# Altium PCB PCB_DC.PcbDoc
Units mm, origin at the board's own origin, x right, y up, seen from the top; angles counter-clockwise.
Board outline 35.05 x 27.18 mm, 2 copper layers (Top Layer, Bottom Layer); 11 components, 3 nets, 36 pads, 0 vias.
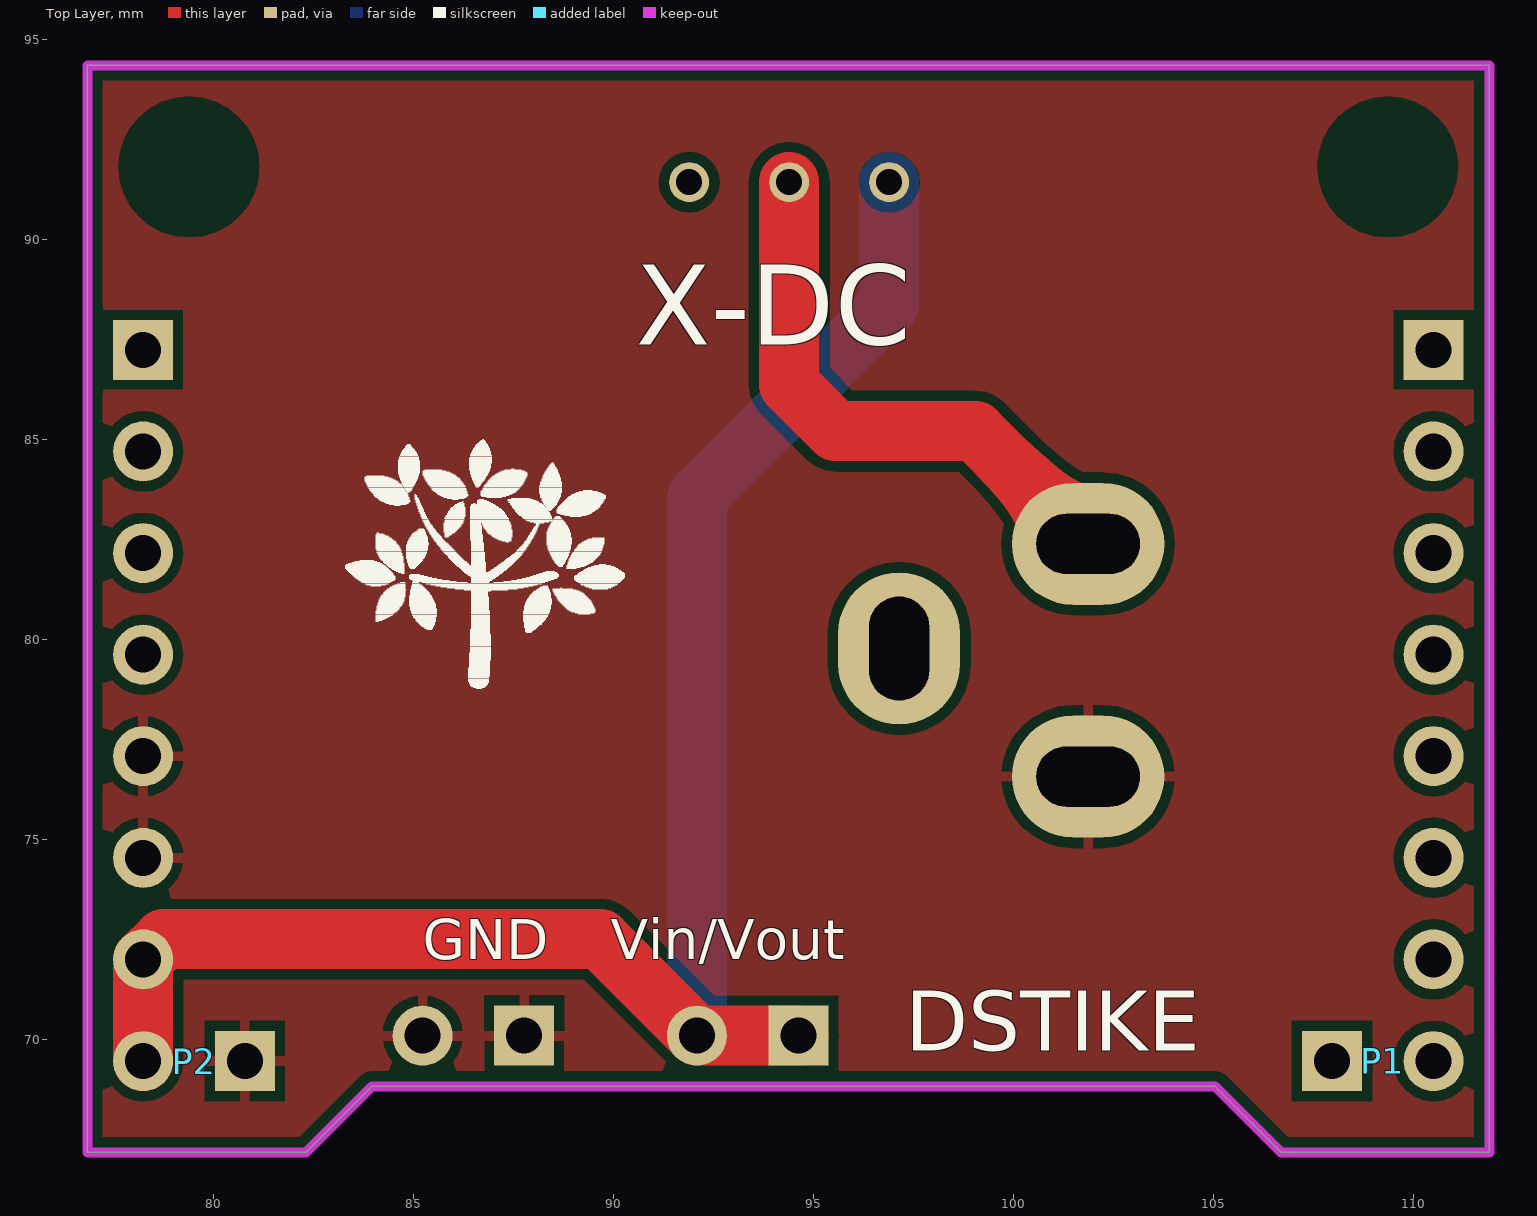
[diagram p0: Top Layer view]
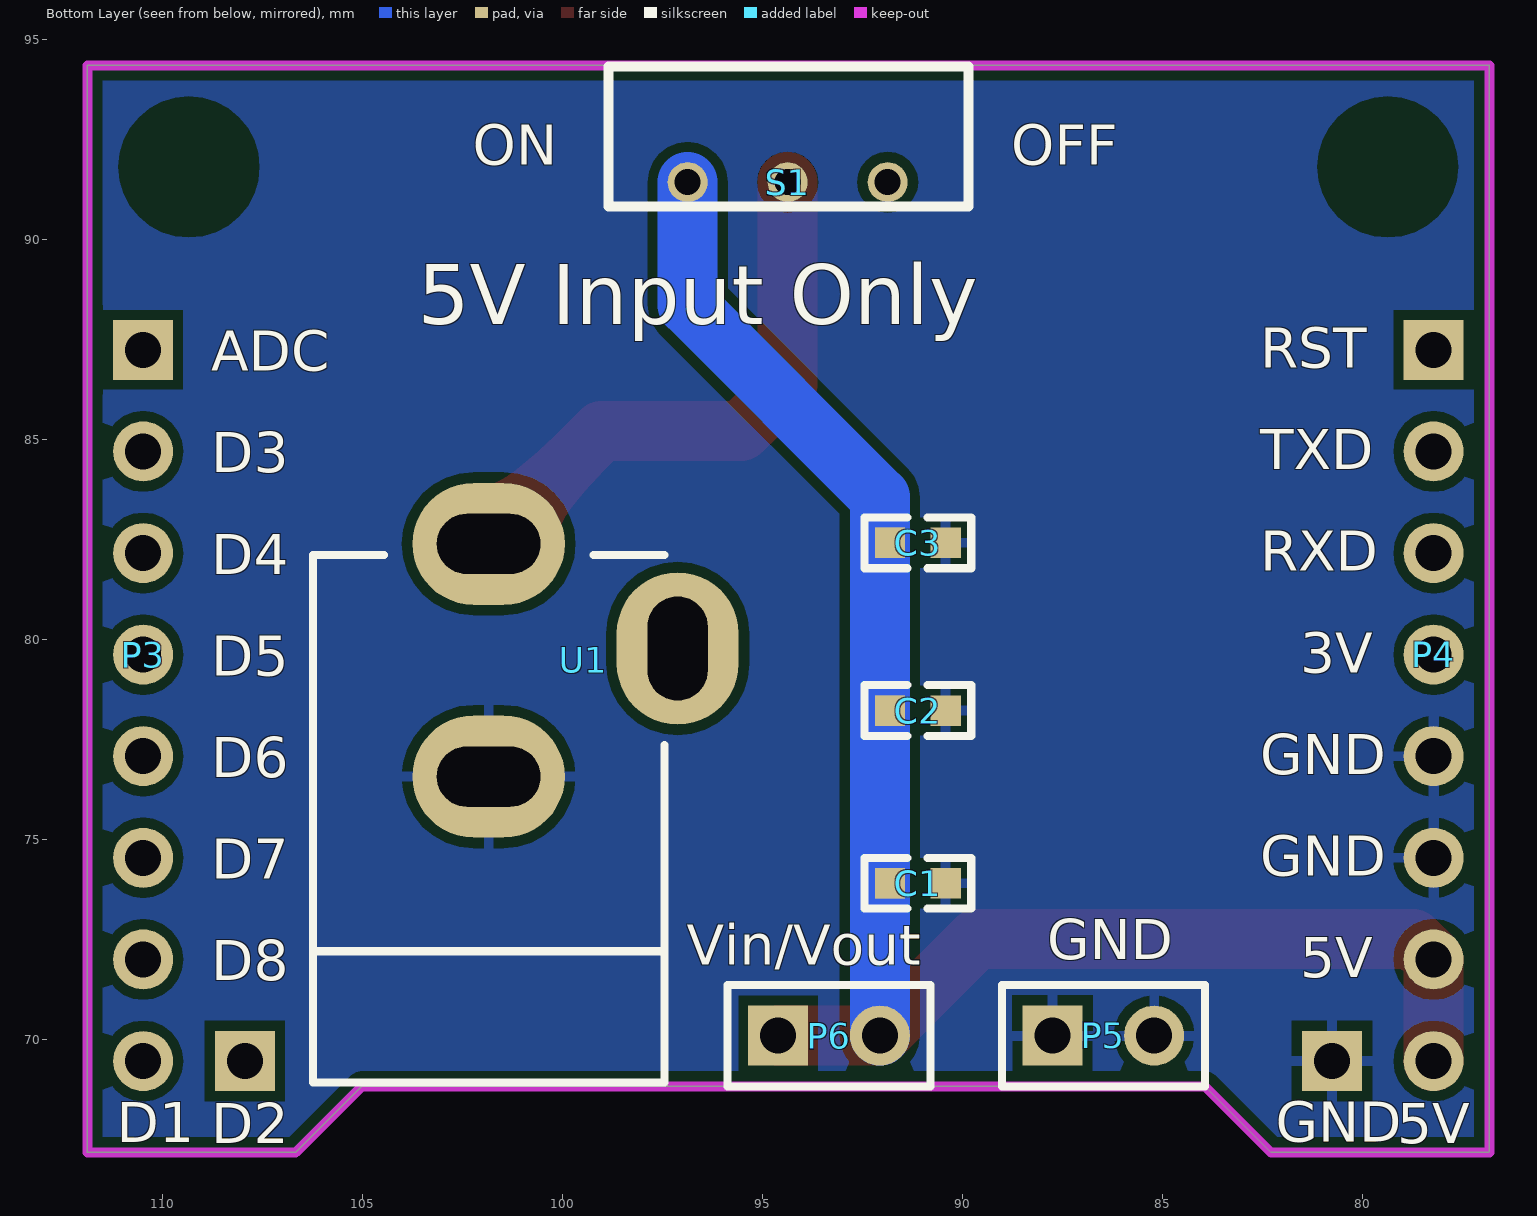
[diagram p1: Bottom Layer view, seen from below]

## Layer stack, top to bottom
Top Solder: solder mask 0.0102, Solder Resist, Dk 3.5
Top Layer: signal copper 0.0356
Dielectric 1: dielectric 0.32, FR-4, Dk 4.8
Bottom Layer: signal copper 0.0356
Bottom Solder: solder mask 0.0102, Solder Resist, Dk 3.5

## Board outline
76.835,67.183 76.835,94.361 111.887,94.361 111.887,67.183 106.68,67.183 105.029,68.834 83.947,68.834 82.296,67.183

## Design rules (kind name [scope] priority, off if disabled: settings)
Clearance [All] p1: gap=0.254
PolygonConnect [All] p1: connectstyle=Relief reliefconductorwidth=0.254 reliefentries=4 polygonreliefangle="90 Angle" airgapwidth=0.254
RoutingVias [All] p1: holewidth=0.711 width=1.27 viastyle="Through Hole" minholewidth=0.711 minwidth=1.27 maxholewidth=0.711 maxwidth=1.27
SolderMaskExpansion [All] p1: expansion=0.102
Width [All] p1: maxlimit=2 minlimit=0.254 preferedwidth=0.254
30 further rules are at their usual default settings.

## Components (designator, comment, footprint, x,y, rotation, side; value= is the part's Value field where it differs from the comment)
C1 "10uF" C0603 91.846,73.736 r180 bottom
C2 "100nF" C0603 91.846,78.054 r180 bottom
C3 "22uF" C0603 91.846,82.245 r180 bottom
P1 "Header 2" HDR1X2 107.95,69.469 r0 top
P2 "Header 2" HDR1X2 80.772,69.469 r180 top
P3 "Header 7" HDR1X7 110.49,87.249 r270 bottom
P4 "Header 7" HDR1X7 78.232,87.249 r270 bottom
P5 "Header 2" HDR1X2 87.757,70.104 r180 bottom
P6 "Header 2" HDR1X2 94.615,70.104 r180 bottom
S1 "Switch for shield" SWITCH_BATTERY 96.88,91.465 r180 bottom
U1 "DC" DC 101.661,79.065 r0 bottom

## Footprints (in the part's own frame and the unit in brackets; to place one, negate y for a bottom-side part, rotate by r counter-clockwise, add the part's x,y. Pads: shape width x height; smd on the part's side, far side on the other; paste and mask are expansions set on the pad)
C0603 [mil]
  rect 30x30 smd: 1(1,7) 2(56,7)
  silkscreen extent -24,-18 81,32
DC [mm]
  oval 3.81x3.048 hole 1.5 slot 2.591 at 0 deg: 1(0.193,-3.332) 2(0.193,2.484)
  oval 3.048x3.81 hole 1.5 slot 2.591 at 90 deg: 3(-4.531,-0.716)
  silkscreen extent -4.2,-3.05 4.59,10.13
HDR1X2 [mm] "Connector; Header; 2 Position"
  rect 1.5x1.5 hole 0.9: 1(0,0)
  round 1.5 hole 0.9: 2(2.54,0)
HDR1X7 [mm] "Connector; Header; 7 Position"
  rect 1.5x1.5 hole 0.9: 1(0,0)
  round 1.5 hole 0.9: 2(2.54,0) 3(5.08,0) 4(7.62,0) 5(10.16,0) 6(12.7,0) 7(15.24,0)
SWITCH_BATTERY [mm]
  round 1 hole 0.65: 1(0,-0.025) 2(2.5,-0.025) 3(5,-0.025)
  silkscreen extent -1.98,-0.63 7.02,2.87

## Part data
C1 C2 C3: library part C0603, "贴片电容"
P1 P2 P5 P6: "Header, 2-Pin"
P3 P4: "Header, 7-Pin"
S1: library part Switch_battery, "三脚开关"
U1: "DC插座"

## Free pads (board coordinates)
  round 3 on Keep-Out: ""(79.375,91.821) ""(109.347,91.821)

## Nets (pads, with @x,y where several pads share a name; then routed paths per layer and width w, separated by ;. In a path a pad name is that pad's centre, name@x,y a point inside that pad or via, vN(x,y) a via of type N, cw(c..) or ccw(c..) an arc to the next point about the centre after c; other vN are vias at no path point)
GND: C1.2 C2.2 C3.2 P2.1 P4.5 P4.6 P5.1 P5.2 U1.2
NetS1_2: S1.2 U1.1 | length 14.2
  Top Layer w1.5: S1.2 94.38,86.379 95.542,85.217 99.035,85.217 U1.1
VCC_OUT: C1.1 C2.1 C3.1 P2.2 P4.7 P6.1 P6.2 S1.1 | length 43.5
  Top Layer w1.5: P2.2 P4.7 78.74,72.517 89.662,72.517 P6.2 P6.1
  Bottom Layer w1.5: P6.2 92.075,82.423 92.075,83.566 96.88,88.371 S1.1
pads on no net: P1.1 P1.2 P3.1 P3.2 P3.3 P3.4 P3.5 P3.6 P3.7 P4.1 P4.2 P4.3 P4.4 S1.3 U1.3

## Polygon pours and split planes (outlines as drawn)
GND on Bottom Layer "Top Layer-No Net" (solid, remove dead copper, pour order 6): 76.073,95.758 76.2,95.885 113.411,95.885 113.411,63.754 114.427,62.738 113.665,63.5 75.311,63.5
GND on Top Layer "Top Layer-No Net" (solid, remove dead copper, pour order 8): 75.438,95.758 113.538,95.758 113.538,65.786 75.438,65.786

## Keep-outs
Keep-Out Layer:
  the board outline again, w0.254

## Silkscreen, mask and mechanical layers (free items; w line width, h text height)
Top Overlay:
  drawing of 1036 lines, arcs and shapes, not listed
  text "X-DC" at 90.551,87.376 h2
  text "GND" at 85.217,72.009 h1
  text "Vin/Vout" at 89.916,72.009 h1
  text "DSTIKE" at 97.282,69.723 h1.5
Bottom Overlay:
  text "OFF" at 88.785,91.88 h1
  text "ON" at 102.247,91.88 h1
  text "5V Input Only" at 103.632,87.884 h1.5
  text "RST" at 82.562,86.8 h1
  text "ADC" at 108.788,86.724 h1
  text "TXD" at 82.562,84.26 h1
  text "D3" at 108.788,84.184 h1
  text "RXD" at 82.562,81.72 h1
  text "D4" at 108.788,81.644 h1
  text "3V" at 81.562,79.18 h1
  text "D5" at 108.788,79.104 h1
  text "GND" at 82.562,76.64 h1
  text "D6" at 108.788,76.564 h1
  text "GND" at 82.562,74.1 h1
  text "D7" at 108.788,74.024 h1
  text "GND" at 87.884,72.009 h1
  text "Vin/Vout" at 96.901,71.882 h1
  text "5V" at 81.562,71.56 h1
  text "D8" at 108.788,71.484 h1
  text "GND" at 82.181,67.445 h1
  text "D1" at 111.15,67.437 h1
  text "5V" at 79.141,67.42 h1
  text "D2" at 108.788,67.412 h1